# EAGLE board cpu (EAGLE 4.15), part 1 of 2

Size 160 x 100 mm. Coordinates in mm from the lower left corner, seen from the top.
Outline: 0,0 160,0 160,100 0,100 0,0
Copper layers (1*16): Top 0.035mm / dielectric 1.5mm / Bottom 0.035mm
Design rules "default": minimum track width 10mil, minimum drill 24mil, track to track 8mil, track to pad 8mil, pad to pad 8mil, via to via 8mil, smd to smd 8mil, copper to edge 40mil, drill to drill 8mil, minimum pad ring 10mil, minimum via ring 8mil, stop-mask expansion 4mil, vias tented up to drill 0mil, thermal gap 10mil

## Footprints (pad centres in the part's own frame; a part is rotated, then mirrored left to right if it is on the bottom)
C0805K = smd 1.3 x 1.6: 1 -1,0; 2 1,0
CAP2.5 = drill 0.813 pad 1.6 octagon: 1 -2.54,0; 2 0,0
C1206 = smd 1.6 x 1.8: 1 -1.4,0; 2 1.4,0
E3,5-10 = drill 0.813 pad 1.6 round: + -1.778,0 | drill 0.813 pad 1.6 octagon: - 1.778,0
UPT = smd 1.27 x 0.762: P$1 0,2.413 | smd 2.54 x 2.667: P$2 0,0
DO214AC = smd 1.8 x 1.7: A 2.05,0; C -2.05,0
SMB = smd 2.4 x 2.4: A 2.2,0; C -2.2,0
SOT23 = smd 1 x 1.4: 1 -0.95,-1.1; 2 0.95,-1.1; 3 0,1.1
T_FILTER = smd 2.54 x 2.54: P$1 0,0 | smd 1.905 x 1.905: P$2 -2.794,0; P$3 2.794,0
LVC2G74 = smd 0.3 x 0.7: 1 0.3,-2.5; 2 0.8,-2.5; 3 1.3,-2.5; 4 1.8,-2.5; 5 1.8,0.2; 6 1.3,0.2; 7 0.8,0.2; 8 0.3,0.2
CR2032V = drill 1.321 pad 3.15 octagon: + -2.54,-5.08; +@1 -2.54,5.08; - 2.286,0
DIL04B = drill 0.813 octagon: 1 -1.27,-5.08; 2 1.27,-5.08; 3 1.27,5.08; 4 -1.27,5.08
DC_DC_TRACO_1W_DUAL = drill 0.9 round: 1 -5.08,3.81; 2 -2.54,3.81; 3 2.54,3.81; 4 5.08,3.81; 5 7.62,3.81
SO14 = smd 0.66 x 2.032: 1 -3.81,-3.073; 2 -2.54,-3.073; 3 -1.27,-3.073; 4 0,-3.073; 5 1.27,-3.073; 6 2.54,-3.073; 7 3.81,-3.073; 8 3.81,3.073; 9 2.54,3.073; 10 1.27,3.073; 11 0,3.073; 12 -1.27,3.073; 13 -2.54,3.073; 14 -3.81,3.073
TQFP-32 = smd 1.27 x 0.559: 1 -4.293,2.743; 2 -4.293,1.956; 3 -4.293,1.168; 4 -4.293,0.381; 5 -4.293,-0.381; 6 -4.293,-1.168; 7 -4.293,-1.956; 8 -4.293,-2.743; 17 4.293,-2.743; 18 4.293,-1.956; 19 4.293,-1.168; 20 4.293,-0.381; 21 4.293,0.381; 22 4.293,1.168; 23 4.293,1.956; 24 4.293,2.743 | smd 0.559 x 1.27: 9 -2.743,-4.293; 10 -1.956,-4.293; 11 -1.168,-4.293; 12 -0.381,-4.293; 13 0.381,-4.293; 14 1.168,-4.293; 15 1.956,-4.293; 16 2.743,-4.293; 25 2.743,4.293; 26 1.956,4.293; 27 1.168,4.293; 28 0.381,4.293; 29 -0.381,4.293; 30 -1.168,4.293; 31 -1.956,4.293; 32 -2.743,4.293
SO14' = smd 0.6 x 2.2: 1 -3.81,-2.6; 2 -2.54,-2.6; 3 -1.27,-2.6; 4 0,-2.6; 5 1.27,-2.6; 6 2.54,-2.6; 7 3.81,-2.6; 8 3.81,2.6; 9 2.54,2.6; 10 1.27,2.6; 11 0,2.6; 12 -1.27,2.6; 13 -2.54,2.6; 14 -3.81,2.6
SOT23-5 = smd 0.6 x 1.2: 1 -0.95,-1.306; 2 0,-1.306; 3 0.95,-1.306; 4 0.95,1.306; 5 -0.95,1.306
SO16 = smd 0.66 x 2.032: 1 -4.445,-3.073; 2 -3.175,-3.073; 3 -1.905,-3.073; 4 -0.635,-3.073; 5 0.635,-3.073; 6 1.905,-3.073; 7 3.175,-3.073; 8 4.445,-3.073; 9 4.445,3.073; 10 3.175,3.073; 11 1.905,3.073; 12 0.635,3.073; 13 -0.635,3.073; 14 -1.905,3.073; 15 -3.175,3.073; 16 -4.445,3.073
LQFP32 = smd 0.4 x 1.2: 1 -2.8,-4.3; 2 -2,-4.3; 3 -1.2,-4.3; 4 -0.4,-4.3; 5 0.4,-4.3; 6 1.2,-4.3; 7 2,-4.3; 8 2.8,-4.3; 17 2.8,4.3; 18 2,4.3; 19 1.2,4.3; 20 0.4,4.3; 21 -0.4,4.3; 22 -1.2,4.3; 23 -2,4.3; 24 -2.8,4.3 | smd 1.2 x 0.4: 9 4.3,-2.8; 10 4.3,-2; 11 4.3,-1.2; 12 4.3,-0.4; 13 4.3,0.4; 14 4.3,1.2; 15 4.3,2; 16 4.3,2.8; 25 -4.3,2.8; 26 -4.3,2; 27 -4.3,1.2; 28 -4.3,0.4; 29 -4.3,-0.4; 30 -4.3,-1.2; 31 -4.3,-2; 32 -4.3,-2.8
DIL_TRACO_DCDC = drill 0.813 long: 1 -13.97,-7.62; 2 -11.43,-7.62; 3 -8.89,-7.62; 9 6.35,-7.62; 10 8.89,-7.62; 11 11.43,-7.62; 12 13.97,-7.62; 13 13.97,7.62; 14 11.43,7.62; 15 8.89,7.62; 16 6.35,7.62; 22 -8.89,7.62; 23 -11.43,7.62; 24 -13.97,7.62
DIL_NMSC_DCDC = drill 0.813 long: 1 -13.97,-7.62; 2 -11.43,-7.62; 8 3.81,-7.62; 9 6.35,-7.62; 10 8.89,-7.62; 11 11.43,-7.62; 12 13.97,-7.62; 13 13.97,7.62; 14 11.43,7.62; 15 8.89,7.62; 16 6.35,7.62; 17 3.81,7.62; 23 -11.43,7.62; 24 -13.97,7.62
SO-08 = smd 0.6 x 2.2: 1 -1.905,-2.6; 2 -0.635,-2.6; 3 0.635,-2.6; 4 1.905,-2.6; 5 1.905,2.6; 6 0.635,2.6; 7 -0.635,2.6; 8 -1.905,2.6
SO8 = smd 0.6 x 2.2: 1 -1.905,-2.6; 2 -0.635,-2.6; 3 0.635,-2.6; 4 1.905,-2.6; 5 1.905,2.6; 6 0.635,2.6; 7 -0.635,2.6; 8 -1.905,2.6
SO20W = smd 0.66 x 2.032: 1 -5.715,-5.029; 2 -4.445,-5.029; 3 -3.175,-5.029; 4 -1.905,-5.029; 5 -0.635,-5.029; 6 0.635,-5.029; 7 1.905,-5.029; 8 3.175,-5.029; 9 4.445,-5.029; 10 5.715,-5.029; 11 5.715,5.029; 12 4.445,5.029; 13 3.175,5.029; 14 1.905,5.029; 15 0.635,5.029; 16 -0.635,5.029; 17 -1.905,5.029; 18 -3.175,5.029; 19 -4.445,5.029; 20 -5.715,5.029
TSOP54 = smd 0.4 x 1.5: 1 -10.4,-5.08; 2 -9.6,-5.08; 3 -8.8,-5.08; 4 -8,-5.08; 5 -7.2,-5.08; 6 -6.4,-5.08; 7 -5.6,-5.08; 8 -4.8,-5.08; 9 -4,-5.08; 10 -3.2,-5.08; 11 -2.4,-5.08; 12 -1.6,-5.08; 13 -0.8,-5.08; 14 0,-5.08; 15 0.8,-5.08; 16 1.6,-5.08; 17 2.4,-5.08; 18 3.2,-5.08; 19 4,-5.08; 20 4.8,-5.08; 21 5.6,-5.08; 22 6.4,-5.08; 23 7.2,-5.08; 24 8,-5.08; 25 8.8,-5.08; 26 9.6,-5.08; 27 10.4,-5.08; 28 10.4,5.08; 29 9.6,5.08; 30 8.8,5.08; 31 8,5.08; 32 7.2,5.08; 33 6.4,5.08; 34 5.6,5.08; 35 4.8,5.08; 36 4,5.08; 37 3.2,5.08; 38 2.4,5.08; 39 1.6,5.08; 40 0.8,5.08; 41 0,5.08; 42 -0.8,5.08; 43 -1.6,5.08; 44 -2.4,5.08; 45 -3.2,5.08; 46 -4,5.08; 47 -4.8,5.08; 48 -5.6,5.08; 49 -6.4,5.08; 50 -7.2,5.08; 51 -8,5.08; 52 -8.8,5.08; 53 -9.6,5.08; 54 -10.4,5.08
ADM811 = smd 1.14 x 0.89: 1 -1.3,1.38 | smd 1.14 x 0.5: 2 -1.3,-0.53; 3 1.34,-0.53; 4 1.35,1.39
JP2Q = drill 0.914 octagon: 1 -1.27,-1.27; 2 -1.27,1.27; 3 1.27,-1.27; 4 1.27,1.27
JUMPER3 = drill 0.914 octagon: 1 -2.54,-1.27; 2 0,-1.27; 3 2.54,-1.27
MA03-2 = drill 1.016 round: 1 -2.54,-1.27 | drill 1.016 octagon: 2 -2.54,1.27; 3 0,-1.27; 4 0,1.27; 5 2.54,-1.27; 6 2.54,1.27
JP4 = drill 0.914 long: 1 -3.81,0; 2 -1.27,0; 3 1.27,0; 4 3.81,0
JTAG_HEADER = smd 2.413 x 0.457: 1 -0.127,-0.635; 2 3.556,-0.635; 3 -0.127,-1.905; 4 3.556,-1.905; 5 -0.127,-3.175; 6 3.556,-3.175; 7 -0.127,-4.445; 8 3.556,-4.445; 9 -0.127,-5.715; 10 3.556,-5.715; 11 -0.127,-6.985; 12 3.556,-6.985; 13 -0.127,-8.255; 14 3.556,-8.255; 15 -0.127,-9.525; 16 3.556,-9.525; 17 -0.127,-10.795; 18 3.556,-10.795; 19 -0.127,-12.065; 20 3.556,-12.065
SNR-V = drill 1.3 round: 11 7.62,1.27; 12 2.54,1.27; 14 12.7,1.27 | drill 1 round: A1 -12.7,1.27; A2 -8.89,1.27
GN-A = smd 0.8 x 3.1: 1 -3.835,-2.65; 2 -0.635,-2.65; 3 1.565,-2.65; 4 3.765,-2.65; 5 3.765,2.65; 6 1.565,2.65; 7 -0.635,2.65; 8 -3.835,2.65
0603 = smd 1.5 x 1: 1 -0.94,0; 2 0.94,0
IND_BLM = smd 1.27 x 1.27: P$1 -1.143,0; P$2 1.143,0
L5650M = smd 1.8 x 4: 1 -2.5,0; 2 2.5,0
CHIPLED_1206 = smd 1.5 x 1.5: A 0,-1.75; C 0,1.75
L02P = drill 1.016 long: 1 1.25,-6.25; 2 -1.25,-6.25
L04P = drill 1.016 long: 1 3.75,-6.25; 2 1.25,-6.25; 3 -1.25,-6.25; 4 -3.75,-6.25
MODU30 = drill 1 square: 1 22.86,-5.08 | drill 1 round: 2 20.32,-5.08; 3 17.78,-5.08; 4 15.24,-5.08; 5 12.7,-5.08; 6 10.16,-5.08; 7 7.62,-5.08; 8 5.08,-5.08; 9 2.54,-5.08; 10 0,-5.08; 11 -2.54,-5.08; 12 -5.08,-5.08; 13 -7.62,-5.08; 14 -10.16,-5.08; 15 -12.7,-5.08; 16 22.86,-2.54; 17 20.32,-2.54; 18 17.78,-2.54; 19 15.24,-2.54; 20 12.7,-2.54; 21 10.16,-2.54; 22 7.62,-2.54; 23 5.08,-2.54; 24 2.54,-2.54; 25 0,-2.54; 26 -2.54,-2.54; 27 -5.08,-2.54; 28 -7.62,-2.54; 29 -10.16,-2.54; 30 -12.7,-2.54
90-2 = drill 1.422 long: 1 -1.75,5.25; 2 1.75,5.25
MODU16 = drill 1 square: P$1 13.97,-5.08 | drill 1 round: P$2 11.43,-5.08; P$3 8.89,-5.08; P$4 6.35,-5.08; P$5 3.81,-5.08; P$6 1.27,-5.08; P$7 -1.27,-5.08; P$8 -3.81,-5.08; P$13 13.97,-2.54; P$14 11.43,-2.54; P$15 8.89,-2.54; P$16 6.35,-2.54; P$17 3.81,-2.54; P$18 1.27,-2.54; P$19 -1.27,-2.54; P$20 -3.81,-2.54
MODU44 = drill 1 square: P$1 0,0 | drill 1 round: P$2 -2.54,0; P$3 -5.08,0; P$4 -7.62,0; P$5 -10.16,0; P$6 -12.7,0; P$7 -15.24,0; P$8 -17.78,0; P$9 -20.32,0; P$10 -22.86,0; P$11 -25.4,0; P$12 -27.94,0; P$13 -30.48,0; P$14 -33.02,0; P$15 -35.56,0; P$16 -38.1,0; P$17 -40.64,0; P$18 -43.18,0; P$19 -45.72,0; P$20 -48.26,0; P$21 -50.8,0; P$22 -53.34,0; P$23 0,2.54; P$24 -2.54,2.54; P$25 -5.08,2.54; P$26 -7.62,2.54; P$27 -10.16,2.54; P$28 -12.7,2.54; P$29 -15.24,2.54; P$30 -17.78,2.54; P$31 -20.32,2.54; P$32 -22.86,2.54; P$33 -25.4,2.54; P$34 -27.94,2.54; P$35 -30.48,2.54; P$36 -33.02,2.54; P$37 -35.56,2.54; P$38 -38.1,2.54; P$39 -40.64,2.54; P$40 -43.18,2.54; P$41 -45.72,2.54; P$42 -48.26,2.54; P$43 -50.8,2.54; P$44 -53.34,2.54
SOT-23 = smd 0.787 x 0.889: 1 0.025,-1.016; 2 -0.94,1.016; 3 0.991,1.016
SO8-2 = smd 0.61 x 1.626: 1 -2.54,-2.54; 2 -1.27,-2.54; 3 0,-2.54; 4 1.27,-2.54; 5 1.27,3.81; 6 0,3.81; 7 -1.27,3.81; 8 -2.54,3.81
DPAK = smd 1.6 x 2.997: 1 -2.261,-4.928; 3 2.21,-4.928 | smd 4.826 x 4.191: 4 0,3.353
SOT54A = drill 0.813 octagon: B 0,1.905; C -1.27,0; E 1.27,0
R0805W = smd 1.5 x 1: 1 -0.94,0; 2 0.94,0
R2010W = smd 2 x 1.8: 1 -2.311,0; 2 2.311,0
NS9360 = smd 0.762 x 0.762: A1 0,0; A2 0,-1.27; A3 0,-2.54; A4 0,-3.81; A5 0,-5.08; A6 0,-6.35; A7 0,-7.62; A8 0,-8.89; A9 0,-10.16; A10 0,-11.43; A11 0,-12.7; A12 0,-13.97; A13 0,-15.24; A14 0,-16.51; A15 0,-17.78; A16 0,-19.05; A17 0,-20.32; A18 0,-21.59; A19 0,-22.86; A20 0,-24.13; B1 -1.27,0; B2 -1.27,-1.27; B3 -1.27,-2.54; B4 -1.27,-3.81; B5 -1.27,-5.08; B6 -1.27,-6.35; B7 -1.27,-7.62; B8 -1.27,-8.89; B9 -1.27,-10.16; B10 -1.27,-11.43; B11 -1.27,-12.7; B12 -1.27,-13.97; B13 -1.27,-15.24; B14 -1.27,-16.51; B15 -1.27,-17.78; B16 -1.27,-19.05; B17 -1.27,-20.32; B18 -1.27,-21.59; B19 -1.27,-22.86; B20 -1.27,-24.13; C1 -2.54,0; C2 -2.54,-1.27; C3 -2.54,-2.54; C4 -2.54,-3.81; C5 -2.54,-5.08; C6 -2.54,-6.35; C7 -2.54,-7.62; C8 -2.54,-8.89; C9 -2.54,-10.16; C10 -2.54,-11.43; C11 -2.54,-12.7; C12 -2.54,-13.97; C13 -2.54,-15.24; C14 -2.54,-16.51; C15 -2.54,-17.78; C16 -2.54,-19.05; C17 -2.54,-20.32; C18 -2.54,-21.59; C19 -2.54,-22.86; C20 -2.54,-24.13; D1 -3.81,0; D2 -3.81,-1.27; D3 -3.81,-2.54; D4 -3.81,-3.81; D5 -3.81,-5.08; D6 -3.81,-6.35; D7 -3.81,-7.62; D8 -3.81,-8.89; D9 -3.81,-10.16; D10 -3.81,-11.43; D11 -3.81,-12.7; D12 -3.81,-13.97; D13 -3.81,-15.24; D14 -3.81,-16.51; D15 -3.81,-17.78; D16 -3.81,-19.05; D17 -3.81,-20.32; D18 -3.81,-21.59; D19 -3.81,-22.86; D20 -3.81,-24.13; E1 -5.08,0; E2 -5.08,-1.27; E3 -5.08,-2.54; E4 -5.08,-3.81; E17 -5.08,-20.32; E18 -5.08,-21.59; E19 -5.08,-22.86; E20 -5.08,-24.13; F1 -6.35,0; F2 -6.35,-1.27; F3 -6.35,-2.54; F4 -6.35,-3.81; F17 -6.35,-20.32; F18 -6.35,-21.59; F19 -6.35,-22.86; F20 -6.35,-24.13; G1 -7.62,0; G2 -7.62,-1.27; G3 -7.62,-2.54; G4 -7.62,-3.81; G17 -7.62,-20.32; G18 -7.62,-21.59; G19 -7.62,-22.86; G20 -7.62,-24.13; H1 -8.89,0; H2 -8.89,-1.27; H3 -8.89,-2.54; H4 -8.89,-3.81; H17 -8.89,-20.32; H18 -8.89,-21.59; H19 -8.89,-22.86; H20 -8.89,-24.13; J1 -10.16,0; J2 -10.16,-1.27; J3 -10.16,-2.54; J4 -10.16,-3.81; J9 -10.16,-10.16; J10 -10.16,-11.43; J11 -10.16,-12.7; J12 -10.16,-13.97; J17 -10.16,-20.32; J18 -10.16,-21.59; J19 -10.16,-22.86; J20 -10.16,-24.13; K1 -11.43,0; K2 -11.43,-1.27; K3 -11.43,-2.54; K4 -11.43,-3.81; K9 -11.43,-10.16; K10 -11.43,-11.43; K11 -11.43,-12.7; K12 -11.43,-13.97; K17 -11.43,-20.32; K18 -11.43,-21.59; K19 -11.43,-22.86; K20 -11.43,-24.13; L1 -12.7,0; L2 -12.7,-1.27; L3 -12.7,-2.54; L4 -12.7,-3.81; L9 -12.7,-10.16; L10 -12.7,-11.43; L11 -12.7,-12.7; L12 -12.7,-13.97; L17 -12.7,-20.32; L18 -12.7,-21.59; L19 -12.7,-22.86; L20 -12.7,-24.13; M1 -13.97,0; M2 -13.97,-1.27; M3 -13.97,-2.54; M4 -13.97,-3.81; M9 -13.97,-10.16; M10 -13.97,-11.43; M11 -13.97,-12.7; M12 -13.97,-13.97; M17 -13.97,-20.32; M18 -13.97,-21.59; M19 -13.97,-22.86; M20 -13.97,-24.13; N1 -15.24,0; N2 -15.24,-1.27; N3 -15.24,-2.54; N4 -15.24,-3.81; N17 -15.24,-20.32; N18 -15.24,-21.59; N19 -15.24,-22.86; N20 -15.24,-24.13; P1 -16.51,0; P2 -16.51,-1.27; P3 -16.51,-2.54; P4 -16.51,-3.81; P17 -16.51,-20.32; P18 -16.51,-21.59; P19 -16.51,-22.86; P20 -16.51,-24.13; R1 -17.78,0; R2 -17.78,-1.27; R3 -17.78,-2.54; R4 -17.78,-3.81; R17 -17.78,-20.32; R18 -17.78,-21.59; R19 -17.78,-22.86; R20 -17.78,-24.13; T1 -19.05,0; T2 -19.05,-1.27; T3 -19.05,-2.54; T4 -19.05,-3.81; T17 -19.05,-20.32; T18 -19.05,-21.59; T19 -19.05,-22.86; T20 -19.05,-24.13; U1 -20.32,0; U2 -20.32,-1.27; U3 -20.32,-2.54; U4 -20.32,-3.81; U5 -20.32,-5.08; U6 -20.32,-6.35; U7 -20.32,-7.62; U8 -20.32,-8.89; U9 -20.32,-10.16; U10 -20.32,-11.43; U11 -20.32,-12.7; U12 -20.32,-13.97; U13 -20.32,-15.24; U14 -20.32,-16.51; U15 -20.32,-17.78; U16 -20.32,-19.05; U17 -20.32,-20.32; U18 -20.32,-21.59; U19 -20.32,-22.86; U20 -20.32,-24.13; V1 -21.59,0; V2 -21.59,-1.27; V3 -21.59,-2.54; V4 -21.59,-3.81; V5 -21.59,-5.08; V6 -21.59,-6.35; V7 -21.59,-7.62; V8 -21.59,-8.89; V9 -21.59,-10.16; V10 -21.59,-11.43; V11 -21.59,-12.7; V12 -21.59,-13.97; V13 -21.59,-15.24; V14 -21.59,-16.51; V15 -21.59,-17.78; V16 -21.59,-19.05; V17 -21.59,-20.32; V18 -21.59,-21.59; V19 -21.59,-22.86; V20 -21.59,-24.13; W1 -22.86,0; W2 -22.86,-1.27; W3 -22.86,-2.54; W4 -22.86,-3.81; W5 -22.86,-5.08; W6 -22.86,-6.35; W7 -22.86,-7.62; W8 -22.86,-8.89; W9 -22.86,-10.16; W10 -22.86,-11.43; W11 -22.86,-12.7; W12 -22.86,-13.97; W13 -22.86,-15.24; W14 -22.86,-16.51; W15 -22.86,-17.78; W16 -22.86,-19.05; W17 -22.86,-20.32; W18 -22.86,-21.59; W19 -22.86,-22.86; W20 -22.86,-24.13; Y1 -24.13,0; Y2 -24.13,-1.27; Y3 -24.13,-2.54; Y4 -24.13,-3.81; Y5 -24.13,-5.08; Y6 -24.13,-6.35; Y7 -24.13,-7.62; Y8 -24.13,-8.89; Y9 -24.13,-10.16; Y10 -24.13,-11.43; Y11 -24.13,-12.7; Y12 -24.13,-13.97; Y13 -24.13,-15.24; Y14 -24.13,-16.51; Y15 -24.13,-17.78; Y16 -24.13,-19.05; Y17 -24.13,-20.32; Y18 -24.13,-21.59; Y19 -24.13,-22.86; Y20 -24.13,-24.13
TSOP48 = smd 0.3 x 1.6: 1 -5.75,-10.87; 2 -5.25,-10.87; 3 -4.75,-10.87; 4 -4.25,-10.87; 5 -3.75,-10.87; 6 -3.25,-10.87; 7 -2.75,-10.87; 8 -2.25,-10.87; 9 -1.75,-10.87; 10 -1.25,-10.87; 11 -0.75,-10.87; 12 -0.25,-10.87; 13 0.25,-10.87; 14 0.75,-10.87; 15 1.25,-10.87; 16 1.75,-10.87; 17 2.25,-10.87; 18 2.75,-10.87; 19 3.25,-10.87; 20 3.75,-10.87; 21 4.25,-10.87; 22 4.75,-10.87; 23 5.25,-10.87; 24 5.75,-10.87; 25 5.75,8.33; 26 5.25,8.33; 27 4.75,8.33; 28 4.25,8.33; 29 3.75,8.33; 30 3.25,8.33; 31 2.75,8.33; 32 2.25,8.33; 33 1.75,8.33; 34 1.25,8.33; 35 0.75,8.33; 36 0.25,8.33; 37 -0.25,8.33; 38 -0.75,8.33; 39 -1.25,8.33; 40 -1.75,8.33; 41 -2.25,8.33; 42 -2.75,8.33; 43 -3.25,8.33; 44 -3.75,8.33; 45 -4.25,8.33; 46 -4.75,8.33; 47 -5.25,8.33; 48 -5.75,8.33
MSOP8 = smd 0.4 x 1.1: 1 -0.975,-2.25; 2 -0.325,-2.25; 3 0.325,-2.25; 4 0.975,-2.25; 5 0.975,2.25; 6 0.325,2.25; 7 -0.325,2.25; 8 -0.975,2.25
ISC1893BF = smd 1.54 x 0.34: 1 -0.83,-0.68; 2 -0.83,-1.32; 3 -0.83,-1.97; 4 -0.83,-2.61; 5 -0.83,-3.24; 6 -0.83,-3.88; 7 -0.83,-4.53; 8 -0.83,-5.17; 9 -0.83,-5.83; 10 -0.83,-6.47; 11 -0.83,-7.12; 12 -0.83,-7.76; 13 -0.83,-8.39; 14 -0.83,-9.03; 15 -0.83,-9.68; 16 -0.83,-10.32; 17 -0.83,-10.96; 18 -0.83,-11.6; 19 -0.83,-12.25; 20 -0.83,-12.89; 21 -0.83,-13.52; 22 -0.83,-14.16; 23 -0.83,-14.81; 24 -0.83,-15.45; 25 8.46,-15.46; 26 8.46,-14.82; 27 8.46,-14.17; 28 8.46,-13.53; 29 8.46,-12.9; 30 8.46,-12.26; 31 8.46,-11.61; 32 8.46,-10.97; 33 8.46,-10.33; 34 8.46,-9.69; 35 8.46,-9.04; 36 8.46,-8.4; 37 8.46,-7.77; 38 8.46,-7.13; 39 8.46,-6.48; 40 8.46,-5.84; 41 8.46,-5.18; 42 8.46,-4.54; 43 8.46,-3.89; 44 8.46,-3.25; 45 8.46,-2.62; 46 8.46,-1.98; 47 8.46,-1.33; 48 8.46,-0.69
MURATA_RESONATOR = smd 0.8 x 2.6: 1 -1.5,0; 2 0,0; 3 1.5,0
MM20SS = smd 1.27 x 1.88: 1 -2.794,-1.524; 2 2.794,-1.524; 3 2.794,1.524; 4 -2.794,1.524
HC49_4H_SMX = smd 5.5 x 2: 1 2.5,-1; 2 12,-1
EMI_FILTER_1206 = smd 0.4 x 1.1: 1 0,-0.82; 2 3.4,-0.86 | smd 0.4 x 0.3: 3 0.46,-1.68; 4 1.28,-1.68; 5 2.06,-1.68; 6 2.88,-1.68; 7 0.484,-0.02; 8 1.26,-0.02; 9 2.076,-0.02; 10 2.86,-0.02; P$3 1.26,-0.02; P$21 1.28,-1.68

## Placement (x,y rotation side)
C1  100n  [C0805K]  not placed on the board
C2  100n  [C0805K]  not placed on the board
C3  100n  [C0805K]  not placed on the board
C4  100n  [C0805K]  not placed on the board
C5  100n  [C0805K]  not placed on the board
C6  100n  [C0805K]  not placed on the board
C7  100n  [C0805K]  not placed on the board
C8  47u/25V  [CAP2.5]  not placed on the board
C9  100n  [C0805K]  not placed on the board
C10  100n  [C0805K]  not placed on the board
C11  100n  [C1206]  not placed on the board
C12  NM  [C0805K]  not placed on the board
C13  100n  [C0805K]  not placed on the board
C14  47u/25V  [CAP2.5]  not placed on the board
C15  47u/25V  [CAP2.5]  not placed on the board
C16  100n  [C0805K]  not placed on the board
C17  100n  [C0805K]  not placed on the board
C18  100n  [C0805K]  not placed on the board
C19  1u  [C0805K]  not placed on the board
C20  100n  [C1206]  not placed on the board
C21  100n  [C1206]  not placed on the board
C22  100n  [C1206]  not placed on the board
C23  100n  [C0805K]  not placed on the board
C24  100n  [C0805K]  not placed on the board
C25  47u/25V  [CAP2.5]  not placed on the board
C26  100n  [C0805K]  not placed on the board
C27  47u/50V  [CAP2.5]  not placed on the board
C28  100n  [C0805K]  not placed on the board
C29  100n  [C0805K]  not placed on the board
C30  100n  [C0805K]  not placed on the board
C31  100n  [C1206]  not placed on the board
C32  100n  [C0805K]  not placed on the board
C33  100n  [C0805K]  not placed on the board
C34  100n  [C0805K]  not placed on the board
C35  100n  [C0805K]  not placed on the board
C36  100n  [C0805K]  not placed on the board
C37  100n  [C0805K]  not placed on the board
C38  100n  [C0805K]  not placed on the board
C39  100n  [C1206]  not placed on the board
C40  100n  [C0805K]  not placed on the board
C41  47u/25V  [CAP2.5]  not placed on the board
C42  100n  [C1206]  not placed on the board
C43  100n  [C0805K]  not placed on the board
C44  NM  [C1206]  not placed on the board
C45  330uF  [E3,5-10]  not placed on the board
C46  180uF  [E3,5-10]  not placed on the board
C47  100n  [C0805K]  not placed on the board
C48  100n  [C0805K]  not placed on the board
C49  47u/25V  [CAP2.5]  not placed on the board
C50  470p  [C1206]  not placed on the board
C51  100n  [C0805K]  not placed on the board
C52  220p  [C1206]  not placed on the board
C53  470p  [C1206]  not placed on the board
C54  100p  [C1206]  not placed on the board
C55  100n  [C0805K]  not placed on the board
C56  10p  [C0805K]  not placed on the board
C57  NM  [C0805K]  not placed on the board
C58  NM  [C0805K]  not placed on the board
C59  100n  [C0805K]  not placed on the board
C60  470n  [C0805K]  not placed on the board
C61  NM  [C0805K]  not placed on the board
C62  100p  [C0805K]  not placed on the board
C63  1u0  [C0805K]  not placed on the board
C64  1u0  [C0805K]  not placed on the board
C65  100p  [C0805K]  not placed on the board
C66  100n  [C0805K]  not placed on the board
C67  100n  [C0805K]  not placed on the board
C68  100n  [C0805K]  not placed on the board
C69  100n  [C0805K]  not placed on the board
C70  100n  [C0805K]  not placed on the board
C71  100n  [C0805K]  not placed on the board
C72  1u0  [C0805K]  not placed on the board
C73  1u  [C0805K]  not placed on the board
C74  100p  [C0805K]  not placed on the board
C75  100p  [C0805K]  not placed on the board
C76  100n  [C0805K]  not placed on the board
C77  NM  [C0805K]  not placed on the board
C78  100n  [C0805K]  not placed on the board
C79  NM  [C0805K]  not placed on the board
C80  470n  [C0805K]  not placed on the board
C81  10p  [C0805K]  not placed on the board
C82  100n  [C0805K]  not placed on the board
C83  0p1  [C0805K]  not placed on the board
C84  100n  [C0805K]  not placed on the board
C85  100n  [C0805K]  not placed on the board
C86  100n  [C0805K]  not placed on the board
C87  10n  [C0805K]  not placed on the board
C88  100n  [C0805K]  not placed on the board
C89  10n  [C0805K]  not placed on the board
C90  10n  [C0805K]  not placed on the board
C91  10n  [C0805K]  not placed on the board
C92  1u  [C0805K]  not placed on the board
C93  1u  [C0805K]  not placed on the board
C94  1u  [C0805K]  not placed on the board
C95  1u  [C0805K]  not placed on the board
C96  10u  [C0805K]  not placed on the board
C97  10u  [C0805K]  not placed on the board
C98  10n  [C0805K]  not placed on the board
C99  1u  [C0805K]  not placed on the board
C100  10n  [C0805K]  not placed on the board
C101  100n  [C0805K]  not placed on the board
C102  10n  [C0805K]  not placed on the board
C103  100n  [C0805K]  not placed on the board
C104  10n  [C0805K]  not placed on the board
C105  10n  [C0805K]  not placed on the board
C106  10n  [C0805K]  not placed on the board
C107  100n  [C0805K]  not placed on the board
C108  10n  [C0805K]  not placed on the board
C109  10n  [C0805K]  not placed on the board
C110  1u  [C0805K]  not placed on the board
C111  10u  [C0805K]  not placed on the board
C112  10n  [C0805K]  not placed on the board
C113  10u  [C0805K]  not placed on the board
C114  100u  [CAP2.5]  not placed on the board
C115  100n  [C0805K]  not placed on the board
C116  10u  [C0805K]  not placed on the board
C117  100n  [C0805K]  not placed on the board
C118  100n  [C0805K]  not placed on the board
C119  10n  [C0805K]  not placed on the board
C120  10n  [C0805K]  not placed on the board
C121  100n  [C0805K]  not placed on the board
C122  10n  [C0805K]  not placed on the board
C123  100n  [C0805K]  not placed on the board
C124  10n  [C0805K]  not placed on the board
C125  10n  [C0805K]  not placed on the board
C126  100n  [C0805K]  not placed on the board
C127  10n  [C0805K]  not placed on the board
C128  10n  [C0805K]  not placed on the board
C129  100n  [C0805K]  not placed on the board
C130  10n  [C0805K]  not placed on the board
C131  100n  [C0805K]  not placed on the board
C132  10n  [C0805K]  not placed on the board
C133  100n  [C0805K]  not placed on the board
C134  10n  [C0805K]  not placed on the board
C135  100n  [C0805K]  not placed on the board
C136  10n  [C0805K]  not placed on the board
C137  100n  [C0805K]  not placed on the board
C138  22p  [C0805K]  not placed on the board
C139  22p  [C0805K]  not placed on the board
C140  100n  [C0805K]  not placed on the board
C141  10n  [C0805K]  not placed on the board
C142  100n  [C0805K]  not placed on the board
C143  100n  [C0805K]  not placed on the board
C144  100n  [C0805K]  not placed on the board
C145  100n  [C0805K]  not placed on the board
C146  22p  [C0805K]  not placed on the board
C147  22p  [C0805K]  not placed on the board
C148  100n  [C0805K]  not placed on the board
C149  100n  [C0805K]  not placed on the board
C150  100n  [C0805K]  not placed on the board
C151  100n  [C0805K]  not placed on the board
C152  100n  [C0805K]  not placed on the board
C153  12p  [C0805K]  not placed on the board
C154  12p  [C0805K]  not placed on the board
C155  100n  [C0805K]  not placed on the board
C156  100n  [C0805K]  not placed on the board
C157  1n  [C0805K]  not placed on the board
C158  10n  [C0805K]  not placed on the board
C159  10n  [C0805K]  not placed on the board
C160  10n  [C0805K]  not placed on the board
C161  10n  [C0805K]  not placed on the board
C162  1u  [C0805K]  not placed on the board
C163  1u  [C0805K]  not placed on the board
C164  5n6  [C0805K]  not placed on the board
C165  5n6  [C0805K]  not placed on the board
C166  10u  [C0805K]  not placed on the board
C167  1u  [C0805K]  not placed on the board
C168  1u  [C0805K]  not placed on the board
C169  5n6  [C0805K]  not placed on the board
C170  5n6  [C0805K]  not placed on the board
C171  10u  [C0805K]  not placed on the board
C172  1u  [C0805K]  not placed on the board
C173  1u  [C0805K]  not placed on the board
C174  5n6  [C0805K]  not placed on the board
C175  5n6  [C0805K]  not placed on the board
C176  10u  [C0805K]  not placed on the board
C177  1u  [C0805K]  not placed on the board
C178  1u  [C0805K]  not placed on the board
C179  5n6  [C0805K]  not placed on the board
C180  5n6  [C0805K]  not placed on the board
C181  10u  [C0805K]  not placed on the board
D1  UPT  [UPT]  not placed on the board
D2  UPT  [UPT]  not placed on the board
D3  S1K  [DO214AC]  not placed on the board
D4  SM6T  [SMB]  not placed on the board
D5  BZX84-C12  [SOT23]  not placed on the board
D6  S1K  [DO214AC]  not placed on the board
D7  S1K  [DO214AC]  not placed on the board
D8  S1K  [DO214AC]  not placed on the board
D9  S1K  [DO214AC]  not placed on the board
D10  S1K  [DO214AC]  not placed on the board
D11  S1K  [DO214AC]  not placed on the board
D12  S1K  [DO214AC]  not placed on the board
D13  UPT  [UPT]  not placed on the board
D14  SM6T  [SMB]  not placed on the board
D15  SM6T  [SMB]  not placed on the board
D16  SM6T  [SMB]  not placed on the board
D17  SM6T  [SMB]  not placed on the board
D18  BAS16  [SOT23]  not placed on the board
D19  UPT  [UPT]  not placed on the board
D20  SM6T  [SMB]  not placed on the board
D21  SM6T  [SMB]  not placed on the board
D22  BAS16  [SOT23]  not placed on the board
D23  BAS16  [SOT23]  not placed on the board
D24  SM6T  [SMB]  not placed on the board
D25  BAS16  [SOT23]  not placed on the board
D26  BAS16  [SOT23]  not placed on the board
D27  BAS16  [SOT23]  not placed on the board
D28  BAS16  [SOT23]  not placed on the board
D29  BAS16  [SOT23]  not placed on the board
D30  BAT54S  [SOT23]  not placed on the board
D31  BAT54S  [SOT23]  not placed on the board
D32  BAT54S  [SOT23]  not placed on the board
D33  BAT54S  [SOT23]  not placed on the board
F1  [T_FILTER]  not placed on the board
F2  [T_FILTER]  not placed on the board
F3  [T_FILTER]  not placed on the board
F4  [T_FILTER]  not placed on the board
FF1  SN74LUC2G74  [LVC2G74]  not placed on the board
FF2  SN74LUC2G74  [LVC2G74]  not placed on the board
G1  CR2032V  [CR2032V]  not placed on the board
IC1  SFH617G  [DIL04B]  not placed on the board
IC2  SFH617G  [DIL04B]  not placed on the board
IC3  SFH617G  [DIL04B]  not placed on the board
IC4  SFH617G  [DIL04B]  not placed on the board
IC5  DC_DC_TRACO_1W_DUAL  [DC_DC_TRACO_1W_DUAL]  not placed on the board
IC6  74HCT14D  [SO14]  not placed on the board
IC6_  74HCT14D  [SO14]  not placed on the board
IC7  SFH617G  [DIL04B]  not placed on the board
IC8  ATMEGA8_TQFP  [TQFP-32]  not placed on the board
IC9  SFH617G  [DIL04B]  not placed on the board
IC10  OP747AR  [SO14']  not placed on the board
IC11  74HCT14D  [SO14]  not placed on the board
IC12  LM4120  [SOT23-5]  not placed on the board
IC13  74HC02D  [SO14]  not placed on the board
IC14  74HCT14D  [SO14]  not placed on the board
IC15  MAX232A  [SO16]  not placed on the board
IC16  MAX232A  [SO16]  not placed on the board
IC17  FT232BM  [LQFP32]  not placed on the board
IC18  DC_DC_TRACO_8W  [DIL_TRACO_DCDC]  not placed on the board
IC19  DC_DC_NMSC  [DIL_NMSC_DCDC]  not placed on the board
IC20  74HCT253D  [SO16]  not placed on the board
IC21  93LC66SN  [SO-08]  not placed on the board
IC22  LTC1622  [SO8]  not placed on the board
IC23  M41T81  [SO8]  not placed on the board
IC24  74HCT573D  [SO20W]  not placed on the board
IC25  SDRAM64MB  [TSOP54]  not placed on the board
IC26  SDRAM64MB  [TSOP54]  not placed on the board
IC27  ATMEGA8_TQFP  [TQFP-32]  not placed on the board
IC28  OP747R  [SO14']  not placed on the board
IC29  LM339D  [SO14']  not placed on the board
IC30  24AA64SN  [SO-08]  not placed on the board
IC31  TLC7701  [SO8]  not placed on the board
IC32  ICS7152  [SO8]  not placed on the board
IC33  74HC08D  [SO14]  not placed on the board
IC34  ADM811  [ADM811]  not placed on the board
IC35  LMC7211AI  [SOT23-5]  not placed on the board
IC36  74HCT14D_NM  [SO14]  not placed on the board
IC37  LMC7211AI  [SOT23-5]  not placed on the board
IC38  74HCT14D_NM  [SO14]  not placed on the board
IC39  74HCT14D_NM  [SO14]  not placed on the board
IC40  LMC7211AI  [SOT23-5]  not placed on the board
IC41  74HCT14D_NM  [SO14]  not placed on the board
IC42  LMC7211AI  [SOT23-5]  not placed on the board
J1  [JP2Q]  not placed on the board
J2  JUMPER3  [JUMPER3]  not placed on the board
J3  [MA03-2]  not placed on the board
J4  JUMPER3  [JUMPER3]  not placed on the board
J5  JUMPER3  [JUMPER3]  not placed on the board
J6  [JP4]  not placed on the board
J7  [JP4]  not placed on the board
J8  [MA03-2]  not placed on the board
JTAG1  HEADER  [JTAG_HEADER]  not placed on the board
K2  SNR03024  [SNR-V]  not placed on the board
K4  SNR03024  [SNR-V]  not placed on the board
K5  GN200A1H  [GN-A]  not placed on the board
K6  GN200A1H  [GN-A]  not placed on the board
L1  L1210  [0603]  not placed on the board
L2  BLM18PG  [0603]  not placed on the board
L3  L1210  [0603]  not placed on the board
L4  IND_BLM  [IND_BLM]  not placed on the board
L5  IND_BLM  [IND_BLM]  not placed on the board
L6  IND_BLM  [IND_BLM]  not placed on the board
L7  IND_BLM  [IND_BLM]  not placed on the board
L8  IND_BLM  [IND_BLM]  not placed on the board
L9  IND_BLM  [IND_BLM]  not placed on the board
L10  L1210  [0603]  not placed on the board
L11  [L5650M]  not placed on the board
L12  L1210  [0603]  not placed on the board
L13  BLM18PG  [0603]  not placed on the board
L14  BLM18PG  [0603]  not placed on the board
L15  BLM18PG  [0603]  not placed on the board
L16  BLM18PG  [0603]  not placed on the board
L17  BLM18PG  [0603]  not placed on the board
L18  BLM18PG  [0603]  not placed on the board
L19  BLM18PG  [0603]  not placed on the board
L20  BLM18PG  [0603]  not placed on the board
L21  BLM18PG  [0603]  not placed on the board
L22  BLM18PG  [0603]  not placed on the board
L23  BLM18PG  [0603]  not placed on the board
L24  BLM18PG  [0603]  not placed on the board
L25  BLM18PG  [0603]  not placed on the board
L26  IND_BLM  [IND_BLM]  not placed on the board
L27  IND_BLM  [IND_BLM]  not placed on the board
L28  IND_BLM  [IND_BLM]  not placed on the board
L29  IND_BLM  [IND_BLM]  not placed on the board
L30  IND_BLM  [IND_BLM]  not placed on the board
L31  IND_BLM  [IND_BLM]  not placed on the board
L32  IND_BLM  [IND_BLM]  not placed on the board
L33  IND_BLM  [IND_BLM]  not placed on the board
L34  IND_BLM  [IND_BLM]  not placed on the board
L35  IND_BLM  [IND_BLM]  not placed on the board
L36  IND_BLM  [IND_BLM]  not placed on the board
L37  IND_BLM  [IND_BLM]  not placed on the board
LED1  [CHIPLED_1206]  not placed on the board
LED2  [CHIPLED_1206]  not placed on the board
P1  [L02P]  not placed on the board
P2  [L04P]  not placed on the board
P3  [MODU30]  not placed on the board
P4  [90-2]  not placed on the board
P5  [MODU16]  not placed on the board
P6  [MODU44]  not placed on the board
P8  [MODU16]  not placed on the board
Q1  BSS123  [SOT23]  not placed on the board
Q2  BSS123  [SOT23]  not placed on the board
Q3  IRF7471  [SO8]  not placed on the board
Q4  BC847  [SOT-23]  not placed on the board
Q5  IRF7103  [SO8-2]  not placed on the board
Q6  IRF7103  [SO8-2]  not placed on the board
Q7  IRF7471  [SO8]  not placed on the board
Q8  IRF7103  [SO8-2]  not placed on the board
Q9  IRFR5305  [DPAK]  not placed on the board
Q10  BSS123  [SOT23]  not placed on the board
Q11  BSS123  [SOT23]  not placed on the board
Q12  FDV304P  [SOT23]  not placed on the board
Q13  BSS123  [SOT23]  not placed on the board
Q14  BSS123  [SOT23]  not placed on the board
Q15  IRF7422  [SO8]  not placed on the board
Q16  BSS123  [SOT23]  not placed on the board
Q17  BC327  [SOT54A]  not placed on the board
Q18  BSS123  [SOT23]  not placed on the board
Q19  IRF7422  [SO8]  not placed on the board
Q29  BSS123  [SOT23]  not placed on the board
Q30  BSS123  [SOT23]  not placed on the board
Q31  BSS123  [SOT23]  not placed on the board
R1  470R  [R0805W]  not placed on the board
R2  470R  [R0805W]  not placed on the board
R3  2K21  [R0805W]  not placed on the board
R4  10k  [R0805W]  not placed on the board
R5  10k  [R0805W]  not placed on the board
R6  10k  [R0805W]  not placed on the board
R7  0R  [R0805W]  not placed on the board
R8  0R  [R0805W]  not placed on the board
R9  0R  [R0805W]  not placed on the board
R10  10k  [R0805W]  not placed on the board
R11  0R  [R0805W]  not placed on the board
R12  NM  [R0805W]  not placed on the board
R13  100R  [R0805W]  not placed on the board
R14  10K  [R0805W]  not placed on the board
R15  10K  [R0805W]  not placed on the board
R16  100R  [R0805W]  not placed on the board
R17  10K  [R0805W]  not placed on the board
R18  100R  [R0805W]  not placed on the board
R19  4K75  [R0805W]  not placed on the board
R20  100R  [R0805W]  not placed on the board
R21  2K21  [R0805W]  not placed on the board
R22  2K21  [R0805W]  not placed on the board
R23  470R  [R0805W]  not placed on the board
R24  10k  [R0805W]  not placed on the board
R25  10k  [R0805W]  not placed on the board
R26  10k  [R0805W]  not placed on the board
R27  0R  [R0805W]  not placed on the board
R28  10k  [R0805W]  not placed on the board
R29  470R  [R0805W]  not placed on the board
R30  100k  [R0805W]  not placed on the board
R31  1K  [R0805W]  not placed on the board
R32  2K21  [R0805W]  not placed on the board
R33  10k  [R0805W]  not placed on the board
R34  10k  [R0805W]  not placed on the board
R35  10k  [R0805W]  not placed on the board
R36  470R  [R0805W]  not placed on the board
R37  10k  [R0805W]  not placed on the board
R38  100R  [R0805W]  not placed on the board
R39  100R  [R0805W]  not placed on the board
R40  1K  [R0805W]  not placed on the board
R41  1K  [R0805W]  not placed on the board
R42  10k  [R0805W]  not placed on the board
R43  2K21  [R0805W]  not placed on the board
R44  3K3  [R0805W]  not placed on the board
R45  1K  [R0805W]  not placed on the board
R46  100R  [R0805W]  not placed on the board
R47  10k  [R0805W]  not placed on the board
R48  1k  [R0805W]  not placed on the board
R49  10K  [R0805W]  not placed on the board
R50  10k  [R0805W]  not placed on the board
R51  [R0805W]  not placed on the board
R52  2k2  [R0805W]  not placed on the board
R53  2K21  [R0805W]  not placed on the board
R54  100R  [R0805W]  not placed on the board
R55  1K  [R0805W]  not placed on the board
R56  220K  [R0805W]  not placed on the board
R57  220K  [R0805W]  not placed on the board
R58  10k  [R0805W]  not placed on the board
R59  470R  [R0805W]  not placed on the board
R60  10K  [R0805W]  not placed on the board
R61  4K75  [R0805W]  not placed on the board
R62  4K75  [R0805W]  not placed on the board
R63  4K75  [R0805W]  not placed on the board
R64  4K75  [R0805W]  not placed on the board
R65  10k  [R0805W]  not placed on the board
R66  100R  [R0805W]  not placed on the board
R67  220K  [R0805W]  not placed on the board
R68  1K  [R0805W]  not placed on the board
R69  1K  [R0805W]  not placed on the board
R70  220K  [R0805W]  not placed on the board
R71  100R  [R0805W]  not placed on the board
R72  100R  [R0805W]  not placed on the board
R73  1K  [R0805W]  not placed on the board
R74  1K  [R0805W]  not placed on the board
R75  220K  [R0805W]  not placed on the board
R76  220K  [R0805W]  not placed on the board
R77  1K  [R0805W]  not placed on the board
R78  100R  [R0805W]  not placed on the board
R79  137R  [R0805W]  not placed on the board
R80  10k  [R0805W]  not placed on the board
R81  1K  [R0805W]  not placed on the board
R82  137R  [R0805W]  not placed on the board
R83  100R  [R0805W]  not placed on the board
R84  1K  [R0805W]  not placed on the board
R85  1K  [R0805W]  not placed on the board
R86  1k  [R0805W]  not placed on the board
R87  1k  [R0805W]  not placed on the board
R88  100R  [R0805W]  not placed on the board
R89  10k  [R0805W]  not placed on the board
R90  10k  [R0805W]  not placed on the board
R91  470R  [R0805W]  not placed on the board
R92  1k5  [R0805W]  not placed on the board
R93  27R  [R0805W]  not placed on the board
R94  27R  [R0805W]  not placed on the board
R95  4k7  [R0805W]  not placed on the board
R96  10k  [R0805W]  not placed on the board
R97  2k2  [R0805W]  not placed on the board
R98  2,4k  [R0805W]  not placed on the board
R99  2,4k  [R0805W]  not placed on the board
R100  2,4k  [R0805W]  not placed on the board
R101  2,4k  [R0805W]  not placed on the board
R102  2k2  [R0805W]  not placed on the board
R103  2k2  [R0805W]  not placed on the board
R104  2k2  [R0805W]  not placed on the board
R105  0R025  [R2010W]  not placed on the board
R106  2,4k  [R0805W]  not placed on the board
R107  2,4k  [R0805W]  not placed on the board
R108  NM  [R0805W]  not placed on the board
R109  NM  [R0805W]  not placed on the board
R110  NM  [R0805W]  not placed on the board
R111  15k  [R0805W]  not placed on the board
R112  12k1  [R0805W]  not placed on the board
R113  2k4  [R0805W]  not placed on the board
R114  2K21  [R0805W]  not placed on the board
R115  3k32  [R0805W]  not placed on the board
R116  6k81  [R0805W]  not placed on the board
R117  560k  [R0805W]  not placed on the board
R118  150k  [R0805W]  not placed on the board
R119  150k  [R0805W]  not placed on the board
R120  560k  [R0805W]  not placed on the board
R121  NM  [R0805W]  not placed on the board
R122  3k92  [R0805W]  not placed on the board
R123  NM  [R0805W]  not placed on the board
R124  3k92  [R0805W]  not placed on the board
R125  10R  [R0805W]  not placed on the board
R126  3k32  [R0805W]  not placed on the board
R127  3k32  [R0805W]  not placed on the board
R128  6k81  [R0805W]  not placed on the board
R129  2k21  [R0805W]  not placed on the board
R130  [R0805W]  not placed on the board
R131  [R0805W]  not placed on the board
R132  10R  [R0805W]  not placed on the board
R133  3k32  [R0805W]  not placed on the board
R134  3k32  [R0805W]  not placed on the board
R135  3k92  [R0805W]  not placed on the board
R136  560k  [R0805W]  not placed on the board
R137  NM  [R0805W]  not placed on the board
R138  6k81  [R0805W]  not placed on the board
R139  150k  [R0805W]  not placed on the board
R140  150k  [R0805W]  not placed on the board
R141  NM  [R0805W]  not placed on the board
R142  6k81  [R0805W]  not placed on the board
R143  3k32  [R0805W]  not placed on the board
R144  3k92  [R0805W]  not placed on the board
R145  560k  [R0805W]  not placed on the board
R146  61.9R  [R0805W]  not placed on the board
R147  NM  [R0805W]  not placed on the board
R148  27k  [R0805W]  not placed on the board
R149  2k4  [R0805W]  not placed on the board
R150  2k4  [R0805W]  not placed on the board
R151  2k4  [R0805W]  not placed on the board
R152  47R  [R0805W]  not placed on the board
R153  1k  [R0805W]  not placed on the board
R154  1k  [R0805W]  not placed on the board
R155  10k  [R0805W]  not placed on the board
R156  1k  [R0805W]  not placed on the board
R157  1k  [R0805W]  not placed on the board
R158  10k  [R0805W]  not placed on the board
R159  2.4k  [R0805W]  not placed on the board
R160  0  [R0805W]  not placed on the board
R161  47R  [R0805W]  not placed on the board
R162  47R  [R0805W]  not placed on the board
R163  2k4  [R0805W]  not placed on the board
R164  2k4  [R0805W]  not placed on the board
R165  2k4  [R0805W]  not placed on the board
R166  2k4  [R0805W]  not placed on the board
R167  2k4  [R0805W]  not placed on the board
R168  2k4  [R0805W]  not placed on the board
R169  2k4  [R0805W]  not placed on the board
R170  2k4  [R0805W]  not placed on the board
R171  2k4  [R0805W]  not placed on the board
R172  2k4  [R0805W]  not placed on the board
R173  2k4  [R0805W]  not placed on the board
R174  2k4  [R0805W]  not placed on the board
R175  2k4  [R0805W]  not placed on the board
R176  2k4  [R0805W]  not placed on the board
R177  2k4  [R0805W]  not placed on the board
R178  2k4  [R0805W]  not placed on the board
R179  15k  [R0805W]  not placed on the board
R180  15k  [R0805W]  not placed on the board
R181  15k  [R0805W]  not placed on the board
R182  15k  [R0805W]  not placed on the board
R183  15k  [R0805W]  not placed on the board
R184  15k  [R0805W]  not placed on the board
R185  1.5M  [R0805W]  not placed on the board
R186  82R  [R0805W]  not placed on the board
R187  2k4  [R0805W]  not placed on the board
R188  15k  [R0805W]  not placed on the board
R189  2k4  [R0805W]  not placed on the board
R190  47R  [R0805W]  not placed on the board
R191  47R  [R0805W]  not placed on the board
R192  2k  [R0805W]  not placed on the board
R193  1k54  [R0805W]  not placed on the board
R194  0R  [R0805W]  not placed on the board
R195  12k1  [R0805W]  not placed on the board
R196  12k1  [R0805W]  not placed on the board
R197  15k  [R0805W]  not placed on the board
R198  15k  [R0805W]  not placed on the board
R199  15k  [R0805W]  not placed on the board
R200  15k  [R0805W]  not placed on the board
R201  2k4  [R0805W]  not placed on the board
R202  2k4  [R0805W]  not placed on the board
R203  61R9  [R0805W]  not placed on the board
R204  61R9  [R0805W]  not placed on the board
R205  61R9  [R0805W]  not placed on the board
R206  61R9  [R0805W]  not placed on the board
R207  330R  [R0805W]  not placed on the board
R208  0R  [R0805W]  not placed on the board
R209  0R  [R0805W]  not placed on the board
R210  0R  [R0805W]  not placed on the board
R211  0R  [R0805W]  not placed on the board
R212  0R  [R0805W]  not placed on the board
R213  0R  [R0805W]  not placed on the board
R214  1k  [R0805W]  not placed on the board
R215  20k  [R0805W]  not placed on the board
R216  1k  [R0805W]  not placed on the board
R217  100k  [R0805W]  not placed on the board
R218  100R  [R0805W]  not placed on the board
R219  1M  [R0805W]  not placed on the board
R220  1k  [R0805W]  not placed on the board
R221  20k  [R0805W]  not placed on the board
R222  1k  [R0805W]  not placed on the board
R223  100k  [R0805W]  not placed on the board
R224  100R  [R0805W]  not placed on the board
R225  1M  [R0805W]  not placed on the board
R226  1k  [R0805W]  not placed on the board
R227  20k  [R0805W]  not placed on the board
R228  1k  [R0805W]  not placed on the board
R229  100k  [R0805W]  not placed on the board
R230  100R  [R0805W]  not placed on the board
R231  1M  [R0805W]  not placed on the board
R232  1k  [R0805W]  not placed on the board
R233  20k  [R0805W]  not placed on the board
R234  1k  [R0805W]  not placed on the board
R235  100k  [R0805W]  not placed on the board
R236  100R  [R0805W]  not placed on the board
R237  1M  [R0805W]  not placed on the board
R238  10k  [R0805W]  not placed on the board
R239  10k  [R0805W]  not placed on the board
R240  1k  [R0805W]  not placed on the board
R241  1k  [R0805W]  not placed on the board
U1  NS9360  [NS9360]  not placed on the board
U2  NS9360  [NS9360]  not placed on the board
U3  NS9360  [NS9360]  not placed on the board
U4  NS9360  [NS9360]  not placed on the board
U5  NS9360  [NS9360]  not placed on the board
U$25  FLASH_M29DW640D  [TSOP48]  not placed on the board
U$64  LP3982  [MSOP8]  not placed on the board
U$81  ICS1893BF  [ISC1893BF]  not placed on the board
X1  MURATA_RESONATOR  [MURATA_RESONATOR]  not placed on the board
X2  32768 Hz  [MM20SS]  not placed on the board
X3  29.4912MHz  [HC49_4H_SMX]  not placed on the board
X4  25MHz  [HC49_4H_SMX]  not placed on the board
Z1  NFA31C  [EMI_FILTER_1206]  not placed on the board
Z2  NFA31C  [EMI_FILTER_1206]  not placed on the board
Z3  NFA31C  [EMI_FILTER_1206]  not placed on the board
Z4  NFA31C  [EMI_FILTER_1206]  not placed on the board
Z5  NFA31C  [EMI_FILTER_1206]  not placed on the board
Z6  NFA31C  [EMI_FILTER_1206]  not placed on the board
Z7  NFA31C  [EMI_FILTER_1206]  not placed on the board
Z8  NFA31C  [EMI_FILTER_1206]  not placed on the board
Z9  NFA31C  [EMI_FILTER_1206]  not placed on the board
Z10  NFA31C  [EMI_FILTER_1206]  not placed on the board
Z11  NFA31C  [EMI_FILTER_1206]  not placed on the board
Z12  NFA31C  [EMI_FILTER_1206]  not placed on the board
Z13  NFA31C  [EMI_FILTER_1206]  not placed on the board

## Library data of the parts
C1-C7 C9-C13 C16-C24 C26 C28-C40 C42-C48 C50-C113 C115-C181 L11 R1-R241 = rcl
C8 C14 C15 C25 C27 C41 C49 C114 D1-D4 D6-D33 F1-F4 FF1 FF2 IC5 IC12 IC15 IC16 IC18 IC19 IC22 IC23 IC25 IC26 IC31 IC32 IC34 IC35 IC37 IC40 IC42 J2 J4 J5 JTAG1 L1-L10 L12-L37 P3 P5 P6 P8 Q3 Q7 Q9 Q15 Q19 U1-U5 U$25 U$64 U$81 X1 X3 X4 Z1-Z13 = lbm
D5 = diode
G1 = battery
IC1-IC4 IC7 IC9 = optocoupler
IC6 IC6_ IC11 IC13 IC14 IC20 IC24 IC33 IC36 IC38 IC39 IC41 = 74xx-eu
IC8 IC27 = atmel_prototype_header
IC10 IC28 IC29 = linear
IC17 = ftdi3
IC21 IC30 = microchip
J1 J6 J7 = jumper
J3 J8 = con-lstb
K2 K4-K6 = relay
LED1 LED2 = led
P1 P2 = con-amp-mt
P4 = con-weidmueller-sl35
Q1 Q2 Q10-Q14 Q16-Q18 Q29-Q31 = transistor-small-signal
Q4 = zetex
Q5 Q6 Q8 = irf-2
X2 = crystal